# Altium PCB STM32.PcbDoc (part 1 of 2)
Units mil, origin at the board's own origin, x right, y up, seen from the top; angles counter-clockwise.
Board outline 5198.85 x 3910.46 mil, 2 copper layers (Top Layer, Bottom Layer); 118 components, 169 nets, 618 pads, 156 vias.
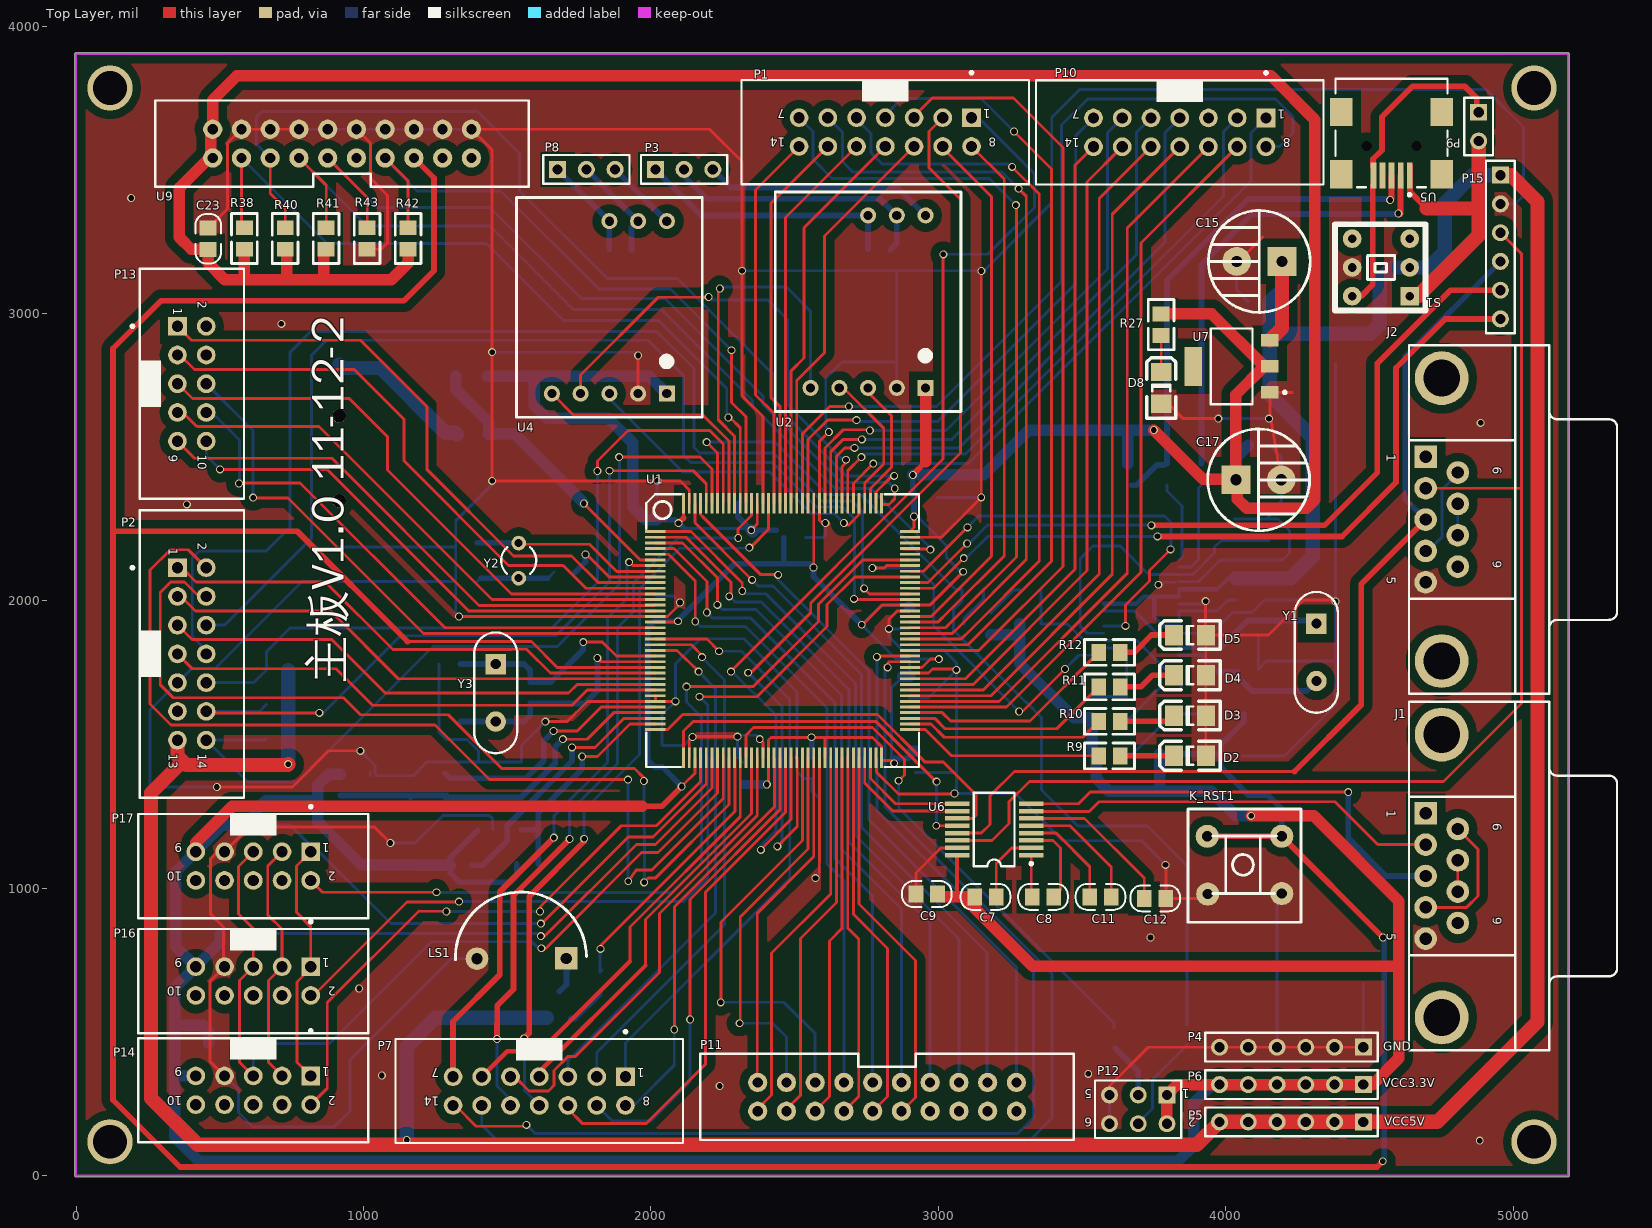
[diagram p0: Top Layer view]
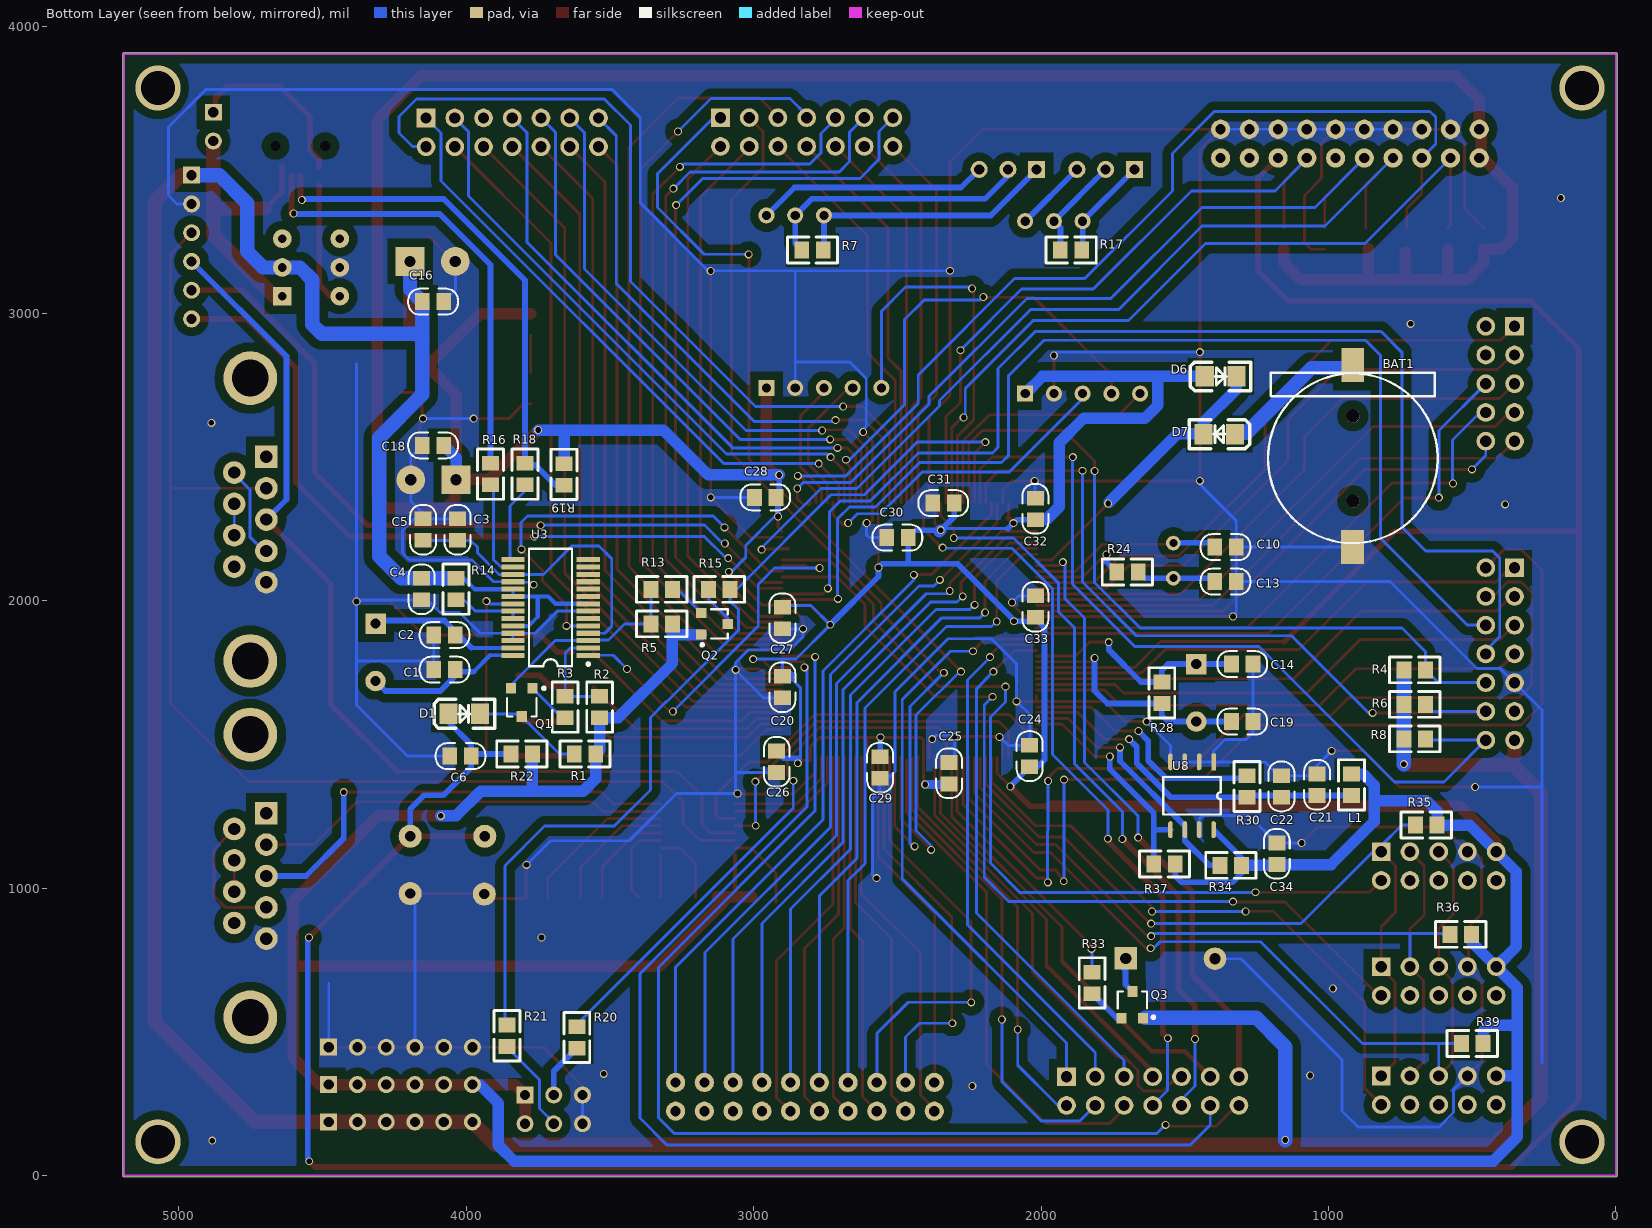
[diagram p1: Bottom Layer view, seen from below]

## Layer stack, top to bottom
Top Layer: signal copper 1.4
Dielectric: dielectric 12.6, FR-4, Dk 4.8
Bottom Layer: signal copper 1.4

## Board outline
-3.95,0 ccw(c0,0) 0,-3.95 5189.96,-3.95 ccw(c5189.96,0) 5192.76,-2.79 5193.74,-1.81 ccw(c5190.94,0.98) 5194.9,0.98 5194.9,3902.56 ccw(c5190.94,3902.56) 5190.94,3906.51 0,3906.51 ccw(c0,3902.56) -3.95,3902.56

## Design rules (kind name [scope] priority, off if disabled: settings)
Clearance [All] p1: gap=5
ComponentClearance [All] p1: gap=10 collisioncheckmode=3 verticalgap=10
HoleSize [All] p1: absolutevalues=TRUE maxlimit=200 minlimit=1 maxpercent=80.000 minpercent=20.000
PolygonConnect [IsVia + IsPad] p1: connectstyle=Direct reliefconductorwidth=10 reliefentries=4 polygonreliefangle="90 Angle"
RoutingVias [All] p1: holewidth=28 width=50 viastyle="Through Hole" minholewidth=19.68 minwidth=27.56 maxholewidth=28 maxwidth=50
SolderMaskExpansion [All] p1: expansion=4
TestPointUsage [All] p1: valid=0 allowmultiple=FALSE
Testpoint [All] p1: side=15 testpointundercomponent=TRUE minsize=40 maxsize=100 preferedsize=60 minholesize=0 maxholesize=40 preferedholesize=32 testpointgrid=1 style=1023 order=0123456789
Width [All] p1: maxlimit=50 minlimit=10 preferedwidth=10
17 further rules are at their usual default settings.

## Components (designator, comment, footprint, x,y, rotation, side; value= is the part's Value field where it differs from the comment)
BAT1 "Battery" 电池槽 915.58,2820.93 r270 bottom
C1 "Cap" 普通贴片电容 4075.58,1760.93 r180 bottom
C2 "Cap" 普通贴片电容 4075.58,1880.93 r180 bottom
C3 "Cap" 普通贴片电容 4030.38,2247.9 r270 bottom
C4 "Cap" 普通贴片电容 4155.58,2040.93 r90 bottom
C5 "Cap" 普通贴片电容 4150.38,2247.9 r90 bottom
C6 "Cap" 普通贴片电容 4020,1460 r0 bottom
C7 "" 普通贴片电容 3164.4,970.3 r180 top
C8 "" 普通贴片电容 3364.4,970.3 r180 top
C9 "" 普通贴片电容 2960,980 r180 top
C10 "Cap" 普通贴片电容 1358.62,2187.17 r180 bottom
C11 "" 普通贴片电容 3564.4,970.3 r180 top
C12 "" 普通贴片电容 3754.32,964.75 r180 top
C13 "Cap" 普通贴片电容 1358.62,2067.17 r180 bottom
C14 "22" 普通贴片电容 1300,1780 r0 bottom
C15 "Cap2" 电容100uf 4195.58,3180.93 r180 top
C16 "Cap" 普通贴片电容 4115.58,3040.93 r0 bottom
C17 "Cap2" 电容100uf 4035.58,2420.93 r0 top
C18 "Cap" 普通贴片电容 4115.58,2540.93 r180 bottom
C19 "22" 普通贴片电容 1300,1580 r0 bottom
C20 "Cap" 普通贴片电容 2900,1700 r90 bottom
C21 "Cap" 普通贴片电容 1040,1360 r270 bottom
C22 "Cap2" 普通贴片电容 1163.86,1354.33 r90 bottom
C23 "Cap" 普通贴片电容 460,3260 r270 top
C24 "Cap" 普通贴片电容 2040,1460 r270 bottom
C25 "Cap" 普通贴片电容 2320,1400 r270 bottom
C26 "Cap" 普通贴片电容 2920,1440 r90 bottom
C27 "Cap" 普通贴片电容 2900,1940 r90 bottom
C28 "Cap" 普通贴片电容 2960,2360 r180 bottom
C29 "Cap" 普通贴片电容 2560,1420 r90 bottom
C30 "Cap" 普通贴片电容 2500,2220 r180 bottom
C31 "Cap" 普通贴片电容 2340,2340 r180 bottom
C32 "Cap" 普通贴片电容 2020,2320 r270 bottom
C33 "Cap" 普通贴片电容 2020,1980 r270 bottom
C34 "Cap" 普通贴片电容 1180,1120 r270 bottom
D1 "Diode" 贴片二极管 4006.76,1606.92 r180 bottom
D2 "LED0" 贴片LED灯 3875.58,1460.93 r0 top
D3 "LED0" 贴片LED灯 3875.58,1600.93 r0 top
D4 "LED0" 贴片LED灯 3875.58,1740.93 r0 top
D5 "LED0" 贴片LED灯 3875.58,1880.93 r0 top
D6 "Diode 1N4148" 贴片二极管 1375.58,2780.93 r180 bottom
D7 "Diode 1N4148" 贴片二极管 1380,2580 r0 bottom
D8 "LED0" 贴片LED灯 3775.58,2740.93 r270 top
J1 "D9" 串口 4695.58,1260.93 r270 top
J2 "D9" 串口 4695.58,2500.93 r270 top
K_RST1 "SW-PB" 按键 3935.58,1180.93 r0 top
L1 "Inductor" 贴片电阻 920,1360 r90 bottom
LS1 "Bell" BELL 860,580 r90 top
P1 "Header 7X2A" CON14a 3115.58,3680.93 r180 top
P2 "Header 7X2" CON14 352.94,2115.42 r270 top
P3 "Header 3" HDR1X3 2015.58,3500.93 r0 top
P4 "Header 6" HDR1X6 4478.62,447.17 r180 top
P5 "Header 6" HDR1X6 4478.62,187.17 r180 top
P6 "Header 6" HDR1X6 4478.62,317.17 r180 top
P7 "Header 7X2A" CON14a 1911.64,344.52 r180 top
P8 "Header 3" HDR1X3 1675.58,3500.93 r0 top
P9 "Header 2" HDR1X2 4880,3700 r270 top
P10 "Header 7X2A" CON14a 4140,3680 r180 top
P11 "Header 10X2" CON20 3271.64,324.52 r180 top
P12 "Header 3X2" HDR2X3 3795.58,280.93 r180 top
P13 "Header 5X2" CON10 352.94,2955.42 r270 top
P14 "Header 5X2" CON10 816.68,347.15 r180 top
P15 "Header 6" HDR1X6 4955.58,3480.93 r270 top
P16 "Header 5X2" CON10 816.68,727.15 r180 top
P17 "Header 5X2" CON10 816.68,1127.15 r180 top
Q1 "NPN" "三极管 NPN" 3806.76,1646.92 r0 bottom
Q2 "PNP" "三极管 PNP" 3140,1920 r270 bottom
Q3 "PNP" "三极管 PNP" 1682.47,590.74 r180 bottom
R1 "Res1" 贴片电阻 3586.76,1466.92 r180 bottom
R2 "Res1" 贴片电阻 3535.82,1630.42 r270 bottom
R3 "Res1" 贴片电阻 3655.82,1630.42 r270 bottom
R4 "Res1" 贴片电阻 700,1760 r0 bottom
R5 "Res1" 贴片电阻 3320,1920 r0 bottom
R6 "Res1" 贴片电阻 700,1640 r0 bottom
R7 "Res1" 贴片电阻 2795.58,3220.93 r180 bottom
R8 "Res1" 贴片电阻 700,1520 r0 bottom
R9 "Res1" 贴片电阻 3595.58,1460.93 r180 top
R10 "Res1" 贴片电阻 3595.58,1580.93 r180 top
R11 "Res1" 贴片电阻 3595.58,1700.93 r180 top
R12 "Res1" 贴片电阻 3595.58,1820.93 r180 top
R13 "Res1" 贴片电阻 3320,2040 r0 bottom
R14 "Res1" 贴片电阻 4035.58,2040.93 r90 bottom
R15 "Res1" 贴片电阻 3120,2040 r0 bottom
R16 "Res1" 贴片电阻 3915.58,2440.93 r90 bottom
R17 "Res1" 贴片电阻 1895.58,3220.93 r180 bottom
R18 "Res1" 贴片电阻 3795.58,2440.93 r90 bottom
R19 "Res1" 贴片电阻 3660,2440 r270 bottom
R20 "Res1" 贴片电阻 3615.58,480.93 r270 bottom
R21 "Res1" 贴片电阻 3858.62,487.17 r90 bottom
R22 "Res1" 贴片电阻 3806.76,1466.92 r180 bottom
R24 "Res1" 贴片电阻 1700,2100 r0 bottom
R27 "Res1" 贴片电阻 3775.58,2960.93 r270 top
R28 "Res1" 贴片电阻 1580,1680 r270 bottom
R30 "Res1" 贴片电阻 1283.86,1354.33 r270 bottom
R33 "Res1" 贴片电阻 1822.47,670.74 r270 bottom
R34 "Res1" 贴片电阻 1570.82,1084.6 r180 bottom
R35 "Res1" 贴片电阻 660,1220 r180 bottom
R36 "Res1" 贴片电阻 540,840 r180 bottom
R37 "Res1" 贴片电阻 1340,1080 r0 bottom
R38 "Res1" 贴片电阻 585.38,3260.93 r90 top
R39 "Res1" 贴片电阻 500,460 r180 bottom
R40 "Res1" 贴片电阻 727.93,3260.93 r90 top
R41 "Res1" 贴片电阻 870.48,3260.93 r90 top
R42 "Res1" 贴片电阻 1155.58,3260.93 r90 top
R43 "Res1" 贴片电阻 1013.03,3260.93 r90 top
S1 "SW DIP-3" 开关 4640,3060 r180 top
U1 "STM32F103ZET6" LQFP144 2015.58,2240.93 r0 top
U2 "RSM485S_CTM8251T" RS485 2955.58,2740.93 r180 top
U3 "PL2303" SSOP28 3706.76,1986.92 r90 bottom
U4 "RSM485S_CTM8251T" RS485 2055.58,2720.93 r180 top
U5 "USB" miniUSB 4640,3480 r90 top
U6 "SP3232" SSOP16 3194.32,1204.75 r90 top
U7 "AMS1117" AMS1117 4015.58,2820.93 r90 top
U8 "24C512" SOP8 1400,1440 r270 bottom
U9 "JTAG" CON20 475.58,3540.93 r0 top
Y1 "XTAL" 晶振 4315.58,1920.93 r270 top
Y2 "32.768K" R38 1540,2140 r180 top
Y3 "8M" 晶振 1460,1780 r270 top

## Footprints (in the part's own frame and the unit in brackets; to place one, negate y for a bottom-side part, rotate by r counter-clockwise, add the part's x,y. Pads: shape width x height; smd on the part's side, far side on the other; paste and mask are expansions set on the pad)
AMS1117 [mm] "AMS1117"
  rect 1.1x1.55 smd: 1(-2.427,-3.502) 2(-0.127,-3.502) 3(2.173,-3.502)
  rect 3.45x1.55 smd: 4(-0.127,3.248)
  silkscreen extent -3.48,-4.95 3.22,1.72
BELL [mm]
  rect 2x2 hole 1: 1(4.47,-21.488)
  round 2 hole 1: 2(4.445,-13.589)
  silkscreen extent 4.35,-23.27 10.34,-11.69
CON10 [mm]
  rect 1.65x1.65 hole 1: 1(0,0)
  round 1.65 hole 1: 2(0,2.54) 3(2.54,0) 4(2.54,2.54) 5(5.08,0) 6(5.08,2.54) 7(7.62,0) 8(7.62,2.54) 9(10.16,0) 10(10.16,2.54)
  silkscreen extent -5.08,-4.1 15.24,5.87, body extent -5.08,-3.33 15.24,5.87, height 9.45
CON14 [mm]
  rect 1.65x1.65 hole 1: 1(0,0)
  round 1.65 hole 1: 2(0,2.54) 3(2.54,0) 4(2.54,2.54) 5(5.08,0) 6(5.08,2.54) 7(7.62,0) 8(7.62,2.54) 9(10.16,0) 10(10.16,2.54) 11(12.7,0) 12(12.7,2.54) 13(15.24,0) 14(15.24,2.54)
  silkscreen extent -5.08,-4.1 20.32,5.87, body extent -5.08,-3.33 20.32,5.87, height 9.45
CON14a [mm]
  rect 1.65x1.65 hole 1: 1(0,0)
  round 1.65 hole 1: 2(2.54,0) 3(5.08,0) 4(7.62,0) 5(10.16,0) 6(12.7,0) 7(15.24,0) 8(0,2.54) 9(2.54,2.54) 10(5.08,2.54) 11(7.62,2.54) 12(10.16,2.54) 13(12.7,2.54) 14(15.24,2.54)
  silkscreen extent -5.08,-4.1 20.32,5.87, body extent -5.08,-3.33 20.32,5.87, height 9.45
CON20 [mm]
  round 1.7 hole 0.9: 1(0,0) 2(0,2.54) 3(2.54,0) 4(2.54,2.54) 5(5.08,0) 6(5.08,2.54) 7(7.62,0) 8(7.62,2.54) 9(10.16,0) 10(10.16,2.54) 11(12.7,0) 12(12.7,2.54) 13(15.24,0) 14(15.24,2.54) 15(17.78,0) 16(17.78,2.54) 17(20.32,0) 18(20.32,2.54) 19(22.86,0) 20(22.86,2.54)
  silkscreen extent -5.08,-2.54 27.94,5.08
HDR1X2 [mm] "Connector; Header; 2 Position"
  rect 1.5x1.5 hole 0.9: 1(0,0)
  round 1.5 hole 0.9: 2(2.54,0)
  silkscreen extent -1.27,-1.27 3.81,1.27
HDR1X3 [mm] "Connector; Header; 3 Position"
  rect 1.5x1.5 hole 0.9: 1(0,0)
  round 1.5 hole 0.9: 2(2.54,0) 3(5.08,0)
  silkscreen extent -1.27,-1.27 6.35,1.27
HDR1X6 [mm] "Connector; Header; 6 Position"
  rect 1.5x1.5 hole 0.9: 1(0,0)
  round 1.5 hole 0.9: 2(2.54,0) 3(5.08,0) 4(7.62,0) 5(10.16,0) 6(12.7,0)
  silkscreen extent -1.27,-1.27 13.97,1.27
HDR2X3 [mm] "Connector; Header; 3x2 Position"
  rect 1.5x1.5 hole 0.9: 1(0,0)
  round 1.5 hole 0.9: 2(0,2.54) 3(2.54,0) 4(2.54,2.54) 5(5.08,0) 6(5.08,2.54)
  silkscreen extent -1.27,-1.27 6.35,3.81
LQFP144 [mm]
  rect 1.8x0.254 smd: 1(0,0) 2(0,-0.5) 3(0,-1) 4(0,-1.5) 5(0,-2) 6(0,-2.5) 7(0,-3) 8(0,-3.5) 9(0,-4) 10(0,-4.5) 11(0,-5) 12(0,-5.5) 13(0,-6) 14(0,-6.5) 15(0,-7) 16(0,-7.5) 17(0,-8) 18(0,-8.5) 19(0,-9) 20(0,-9.5) 21(0,-10) 22(0,-10.5) 23(0,-11) 24(0,-11.5) 25(0,-12) 26(0,-12.5) 27(0,-13) 28(0,-13.5) 29(0,-14) 30(0,-14.5) 31(0,-15) 32(0,-15.5) 33(0,-16) 34(0,-16.5) 35(0,-17) 36(0,-17.5) 73(22.5,-17.5) 74(22.5,-17) 75(22.5,-16.5) 76(22.5,-16) 77(22.5,-15.5) 78(22.5,-15) 79(22.5,-14.5) 80(22.5,-14) 81(22.5,-13.5) 82(22.5,-13) 83(22.5,-12.5) 84(22.5,-12) 85(22.5,-11.5) 86(22.5,-11) 87(22.5,-10.5) 88(22.5,-10) 89(22.5,-9.5) 90(22.5,-9) 91(22.5,-8.5) 92(22.5,-8) 93(22.5,-7.5) 94(22.5,-7) 95(22.5,-6.5) 96(22.5,-6) 97(22.5,-5.5) 98(22.5,-5) 99(22.5,-4.5) 100(22.5,-4) 101(22.5,-3.5) 102(22.5,-3) 103(22.5,-2.5) 104(22.5,-2) 105(22.5,-1.5) 106(22.5,-1) 107(22.5,-0.5) 108(22.5,0)
  rect 0.254x1.8 smd: 37(2.5,-20) 38(3,-20) 39(3.5,-20) 40(4,-20) 41(4.5,-20) 42(5,-20) 43(5.5,-20) 44(6,-20) 45(6.5,-20) 46(7,-20) 47(7.5,-20) 48(8,-20) 49(8.5,-20) 50(9,-20) 51(9.5,-20) 52(10,-20) 53(10.5,-20) 54(11,-20) 55(11.5,-20) 56(12,-20) 57(12.5,-20) 58(13,-20) 59(13.5,-20) 60(14,-20) 61(14.5,-20) 62(15,-20) 63(15.5,-20) 64(16,-20) 65(16.5,-20) 66(17,-20) 67(17.5,-20) 68(18,-20) 69(18.5,-20) 70(19,-20) 71(19.5,-20) 72(20,-20) 109(20,2.5) 110(19.5,2.5) 111(19,2.5) 112(18.5,2.5) 113(18,2.5) 114(17.5,2.5) 115(17,2.5) 116(16.5,2.5) 117(16,2.5) 118(15.5,2.5) 119(15,2.5) 120(14.5,2.5) 121(14,2.5) 122(13.5,2.5) 123(13,2.5) 124(12.5,2.5) 125(12,2.5) 126(11.5,2.5) 127(11,2.5) 128(10.5,2.5) 129(10,2.5) 130(9.5,2.5) 131(9,2.5) 132(8.5,2.5) 133(8,2.5) 134(7.5,2.5) 135(7,2.5) 136(6.5,2.5) 137(6,2.5) 138(5.5,2.5) 139(5,2.5) 140(4.5,2.5) 141(4,2.5) 142(3.5,2.5) 143(3,2.5) 144(2.5,2.5)
  silkscreen extent -0.8,-20.8 23.3,3.3
miniUSB [mm]
  rect 2.3x0.5 smd: 1(0,0) 2(0,0.8) 3(0,1.6) 4(0,2.4) 5(0,3.2)
  rect 2.5x2 smd: 6(0.1,6.05) 7(5.6,6.05) 8(0.1,-2.85) 9(5.6,-2.85)
  round 0.6 hole 0.9 unplated: MH1(2.6,3.8) MH2(2.6,-0.6)
  silkscreen extent -1.82,-3.35 8.55,6.55, body extent -1.05,-3.35 8.55,6.55, height 3.9
R38 [mm] "Crystal, Thru-Hole; 2 Leads; Body 3.1 x 8.2 mm (Dia.xH)"
  round 1.3 hole 0.7: 1(0,1.55) 2(0,-1.55)
  silkscreen extent -1.55,-1.19 1.55,1.17
RS485 [mil]
  rect 56x56 hole 32: 1(0,0)
  round 56 hole 32: 2(100,0) 3(200,0) 4(300,0) 5(400,0) 8(200,-600) 9(100,-600) 10(0,-600)
  silkscreen extent -123,-682 523,82
SOP8 [mm]
  rect 1.5x0.4 smd: 1(0,0)
  oval 1.5x0.4 smd: 2(0,-1.27) 3(0,-2.54) 4(0,-3.81) 5(6,-3.81) 6(6,-2.54) 7(6,-1.27) 8(6,0)
  silkscreen extent 1.33,-4.45 4.67,0.63
SSOP16 [mm] "SSOP; 16 Leads; Body Width 5.3 mm; Pitch 0.65 mm"
  rect 0.4x2.15 smd: 1(-2.275,-3.275) 2(-1.625,-3.275) 3(-0.975,-3.275) 4(-0.325,-3.275) 5(0.325,-3.275) 6(0.975,-3.275) 7(1.625,-3.275) 8(2.275,-3.275) 9(2.275,3.275) 10(1.625,3.275) 11(0.975,3.275) 12(0.325,3.275) 13(-0.325,3.275) 14(-0.975,3.275) 15(-1.625,3.275) 16(-2.275,3.275)
  silkscreen extent -3.25,-3.4 3.25,1.8
SSOP28 [mm] "SP3238"
  rect 0.45x2.05 smd: 1(-4.479,-3.325) 2(-3.829,-3.325) 3(-3.179,-3.325) 4(-2.529,-3.325) 5(-1.879,-3.325) 6(-1.229,-3.325) 7(-0.579,-3.325) 8(0.071,-3.325) 9(0.721,-3.325) 10(1.371,-3.325) 11(2.021,-3.325) 12(2.671,-3.325) 13(3.321,-3.325) 14(3.971,-3.325) 15(3.971,3.325) 16(3.321,3.325) 17(2.671,3.325) 18(2.021,3.325) 19(1.371,3.325) 20(0.721,3.325) 21(0.071,3.325) 22(-0.579,3.325) 23(-1.229,3.325) 24(-1.879,3.325) 25(-2.529,3.325) 26(-3.179,3.325) 27(-3.829,3.325) 28(-4.479,3.325)
  silkscreen extent -5.45,-3.45 4.95,1.9
"三极管 NPN" [mm]
  rect 0.9x0.95 smd: 1(0,1.25) 2(-0.95,-1.25) 3(0.95,-1.25)
  silkscreen extent -2.07,-1.37 1.3,1.25
"三极管 PNP" [mm]
  rect 0.9x0.95 smd: 1(0,1.27) 2(-0.95,-1.08) 3(0.95,-1.08)
  silkscreen extent -1.3,-1.13 1.98,1.27
串口 [mm]
  rect 2x2 hole 1.09: 1(0,0)
  round 2 hole 1.09: 2(2.77,0) 3(5.54,0) 4(8.31,0) 5(11.08,0) 6(1.385,2.84) 7(4.155,2.84) 8(6.925,2.84) 9(9.695,2.84)
  round 4.76 hole 3.26: 10(-6.955,1.42) 11(18.035,1.42)
  silkscreen extent -9.86,-1.48 20.94,16.92
开关 [mil]
  rect 65x65 hole 30: 1(0,0)
  round 65 hole 30: 2(0,-100) 3(0,-200) 4(200,-200) 5(200,-100) 6(200,0)
  silkscreen extent -55,-250 260,50
按键 [mil]
  round 80 hole 35.43: 1(0,0) 1(259.47,0) 2(1.76,-201.22) 2(259.47,-199.45)
  silkscreen extent -67,-299 327,95
普通贴片电容 [mm]
  rect 1.3x1.5 smd: 1(-0.95,0) 2(0.95,0)
  silkscreen extent -2.19,-1.14 2.19,1.14
晶振 [mm]
  rect 1.8x1.8 hole 0.9: 1(0,0)
  round 1.8 hole 0.9: 2(5.08,0)
  silkscreen extent -2.79,-1.91 7.87,1.91
电容100uf [mm]
  rect 2.54x2.54 hole 1: 1(0,0)
  round 2.54 hole 1: 2(4,0)
  silkscreen extent -2.5,-4.5 6.5,4.5
电池槽 [mm]
  round 1.2 hole 1.2: 0(4.505,0) 0(12.005,0)
  rect 3x2 smd: 1(0,0) 2(16.104,-0.025)
  silkscreen extent 0.7,-7.5 15.75,7.5
贴片LED灯 [mm]
  rect 1.6x1.8 smd: 1(-1.4,0) 2(1.4,0)
  silkscreen extent -2.67,-1.27 2.67,1.27
贴片二极管 [mm]
  rect 1.6x1.8 smd: 1(-1.4,0) 2(1.4,0)
  silkscreen extent -2.67,-1.27 2.67,1.27
贴片电阻 [mm]
  rect 1.3x1.5 smd: 1(-0.95,0) 2(0.95,0)
  silkscreen extent -2.22,-1.14 2.22,1.14

## Part data
BAT1: "Multicell Battery"
C1 C2 C3 C4 C5 C6 C10 C13 C15 C16 C17 C18 C20 C21 C22 C23 C24 C25 C26 C27 C28 C29 C30 C31 C32 C33 C34: "Capacitor"
C7 C8 C9 C11 C12: library part "Cap Semi", "Capacitor (Semiconductor SIM Model)"
C14 C19: library part Cap, "Capacitor"
D1: "Default Diode"
D2 D3 D4 D5 D8: "Typical INFRARED GaAs LED"
D6 D7: "High Conductance Fast Diode"
J1 J2: library part "D Connector 9", "Receptacle Assembly, 9 Position, Right Angle"
K_RST1: "Switch"
LS1: "Electrical Bell"
P1 P2 P7 P10: "Header, 7-Pin, Dual row"
P3 P8: "Header, 3-Pin"
P4 P5 P6 P15: "Header, 6-Pin"
P9: "Header, 2-Pin"
P11: "Header, 10-Pin, Dual row"
P12: "Header, 3-Pin, Dual row"
P13 P14 P16 P17: "Header, 5-Pin, Dual row"
Q1: "NPN Bipolar Transistor"
Q2 Q3: "PNP Bipolar Transistor"
R1 R2 R3 R4 R5 R6 R7 R8 R9 R10 R11 R12 R13 R14 R15 R16 R17 R18 R19 R20 R21 R22 R24 R27 R28 R30 R33 R34 R35 R36 R37 R38 R39 R40 R41 R42 R43: "Resistor"
S1: "DIP Switch, 3 Position, SPST"
U6: library part MAX232
U8: library part ST24C02M1, "Serial 2K (256 x 8) EEPROM"
Y1: "Crystal Oscillator"
Y2 Y3: library part XTAL, "Crystal Oscillator"

## Free pads (board coordinates)
  round 157.48 hole 118.11: 0(5072.83,3784.45) 1(5072.83,118.11) 2(118.11,118.11) 3(118.11,3784.45)

## Via types
v1: diameter 27.56, hole 19.68, Top Layer to Bottom Layer, 156 vias

## Nets (pads, with @x,y where several pads share a name; then routed paths per layer and width w, separated by ;. In a path a pad name is that pad's centre, name@x,y a point inside that pad or via, vN(x,y) a via of type N, cw(c..) or ccw(c..) an arc to the next point about the centre after c; other vN are vias at no path point)
3V3: C3.2 C5.1 U3.4 U3.17 | length 1103.1
  Bottom Layer w10: U3.4@3575.86,1887.35 3518.16,1887.35 3493.97,1911.55 3493.97,2146.52 3538.26,2190.82 3633.1,2190.82 3731.84,2092.08 U3.17@3837.67,2092.08 3886.37,2092.08 3961.49,2167.19 3961.49,2186.88 3985.11,2210.5 C3.2@4030.38,2210.5 C5.1@4150.38,2210.5
4851A: P3.2 R7.1 U2.9 | length 948.7
  Bottom Layer w20: P3.2@2115.58,3500.93 2115.58,3478.65 2195.61,3398.62 2797.89,3398.62 U2.9@2855.58,3340.93 2855.58,3243.53 R7.1@2832.98,3220.94
4851B: P3.1 R7.2 U2.8 | length 923.7
  Bottom Layer w20: P3.1@2015.58,3500.93 2175.58,3340.93 U2.8@2755.58,3340.93 R7.2@2755.58,3223.53
4851G: P3.3 U2.10 | length 806.3
  Bottom Layer w20: P3.3@2215.58,3500.93 2278.52,3437.99 2858.52,3437.99 U2.10@2955.58,3340.93
4852A: P8.2 R17.1 U4.9 | length 363.9
  Bottom Layer w20: P8.2@1775.58,3500.93 U4.9@1955.58,3320.93 1932.98,3298.34 R17.1@1932.98,3220.94
4852B: P8.1 R17.2 U4.8 | length 352
  Bottom Layer w20: P8.1@1675.58,3500.93 U4.8@1855.58,3320.93 R17.2@1855.58,3223.53
4852G: P8.3 U4.10 | length 254.6
  Bottom Layer w20: P8.3@1875.58,3500.93 U4.10@2055.58,3320.93
BEEP: R33.1 U1.46 | length 952.3
  Top Layer w10: v1(1824.8,789.37) 1824.8,800.2 2292.53,1267.92 U1.46@2292.53,1453.53 ; U1.46@2291.17,1456.37 U1.46@2292.53,1455.01
  Bottom Layer w10: v1(1824.8,789.37) 1822.47,787.04 R33.1@1822.47,708.14 R33.1@1829.75,715.42
BOOT0: R15.1 R21.2 U1.138 | length 3334.2
  Top Layer w10: v1(2193.9,2552.17) 2232.12,2513.95 U1.138@2232.12,2342.19
  Bottom Layer w10: v1(2193.9,2552.17) 2431.1,2552.17 2614.17,2369.09 2731.3,2369.09 3060.39,2040 R15.1@3082.6,2040 3082.6,1998.94 3053.36,1969.7 3053.36,1897.64 3303.38,1647.62 3306.21,1647.62 3359.25,1594.58 3359.25,1342.52 3485.24,1216.54 3727.36,1216.54 3865.78,1078.12 R21.2@3865.78,524.57
BOOT1: R20.1 U1.48 | length 1936.3
  Top Layer w10: U1.48@2330.54,1456.37 2330.54,1532.31 2357.28,1559.06 2770.67,1559.06 2881.89,1447.83 2881.89,1393.7 v1(2862.2,1374.02)
  Bottom Layer w10: v1(2862.2,1374.02) 2862.2,1279.53 3611.88,529.85 R20.1@3611.88,514.64
GND: BAT1.2 C1.1 C2.1 C3.1 C4.1 C5.2 C6.2 C9.2 C10.2 C12.1 C13.2 C14.1 C15.2 C16.1 C17.2 C18.1 C19.1 C20.1 C21.1 C22.2 C23.1 C24.1 C25.1 C26.1 C27.1 C28.1 C29.1 C30.1 C31.1 C32.1 C33.1 C34.1 D2.2 D3.2 D4.2 D5.2 D8.2 J1.5 J2.5 K_RST1.2 LS1.2 P2.9 P4.1 P4.2 P4.3 P4.4 P4.5 P4.6 P12.5 P12.6 P14.7 P15.2 P16.7 P17.7 R43.1 S1.5 U1.16 U1.30 U1.31 U1.38 U1.51 U1.61 U1.71 U1.83 U1.94 U1.107 U1.120 U1.130 U1.143 U2.2 U3.7 U3.18 U3.21 U3.25 U3.26 U4.2 U6.15 U7.1 U8.1 U8.2 U8.3 U8.4 U8.7 U9.4 U9.6 U9.8 U9.10 U9.12 U9.14 U9.16 U9.18 U9.20 | length 36852.9
  Top Layer w10: C23.1@460,3297.4 527.12,3364.52 527.12,3592.47 U9.4@575.58,3640.93 U9.8@775.58,3640.93 ; v1(490.16,1352.36) 752.95,1352.36 878.94,1478.35 v1(989.17,1478.35) ; P14.7@516.68,347.15 465.55,398.29 465.55,676.02 512.8,723.27 512.8,865.16 468.5,909.45 468.5,1103.35 492.31,1127.15 P17.7@516.68,1127.15 602.13,1212.6 1038.39,1212.6 v1(1093.58,1157.4) ; U9.12@975.58,3640.93 1024.04,3592.47 1024.04,3470.05 1083.66,3410.43 1083.66,3246.06 1061.13,3223.53 R43.1@1013.03,3223.53 ; v1(1332.47,1945.66) 2057.86,1945.66 2104.33,1992.13 2102.26,1994.19 v1(2101.48,1994.19) ; v1(1632.87,1579.72) 1708.66,1579.72 1779.32,1650.38 v1(2085.42,1650.38) ; U4.2@1955.58,2720.93 v1(1955.58,2853.48) ; U1.31@2015.58,1650.38 U1.30@2015.58,1670.07 ; U1.38@2133.69,1453.53 2133.69,1515.58 2146.65,1528.54 2300.2,1528.54 v1(2301.18,1527.56) ; U1.143@2133.69,2339.36 2133.69,2386.16 2102.53,2417.32 v1(1447.83,2417.32) 1447.83,3568.68 U9.20@1375.58,3640.93 2204.54,3640.93 2316.93,3528.54 2316.93,2713.71 2389.6,2641.05 U1.130@2389.6,2339.36 ; v1(2378.94,1518.7) 2389.6,1508.04 U1.51@2389.6,1453.53 ; 2585.63,1057.09 2586.45,1118.28 U1.61@2586.45,1453.53 ; U1.120@2586.45,2339.36 2586.45,2280.54 2596.32,2270.67 v1(2607.28,2270.67) ; U1.120@2586.61,2363.19 2586.61,2555.12 v1(2619.09,2587.6) ; U1.71@2783.3,1453.53 2784.98,1451.85 2784.98,1404 2861.22,1327.76 v1@3056.1,1327.76 ; v1(2828.74,1902.56) 2828.1,1902.56 2827.76,1902.91 2827.76,1935.04 2858.06,1965.34 U1.94@2901.41,1965.34 ; U1.83@2901.41,1748.81 2966.33,1748.81 2980.32,1762.8 v1@3060.04,1762.8 ; U1.107@2901.41,2221.25 2901.61,2221.46 3010.83,2221.46 v1(3149.37,2360) ; C9.2@2922.6,952.4 2922.6,1053.5 3009.87,1140.78 U6.15@3065.38,1140.78 ; v1@3149.61,2360.24 v1(3149.61,3147.64) ; P12.5@3595.58,280.93 3595.58,312.12 3730.63,447.17 P4.1@4478.62,447.17 ; D8.2@3775.58,2685.82 3800.4,2685.82 3852.36,2633.86 v1(3974.41,2633.86) ; v1@3791.72,1081.31 C12.1@3791.72,964.75 3922.38,964.75 3939.11,981.48 K_RST1.2@4195.05,981.48 ; v1(3930.12,1999.02) 3930.12,1881.51 D5.2@3930.7,1880.93 ; D2.2@3930.7,1460.93 D5.2@3930.7,1880.93 ; C15.2@4038.1,3180.93 4044.12,3180.93 4128.94,3265.75 ; v1(4150.59,2633.86) 4156.03,2641.49 C17.2@4193.06,2420.93 ; v1@4153.45,2638.69 U7.1@4153.45,2725.38 4231.29,2725.38 ; v1@4376.97,2002.95 4270.67,2002.95 4148.65,1880.93 D5.2@3930.7,1880.93
  Bottom Layer w10: 257.87,391.73 257.87,1620.35 402.56,1765.04 483.54,1765.04 785.67,2067.16 C13.2@1321.22,2067.16 ; 257.87,1353.35 258.86,1352.36 v1(490.16,1352.36) ; 257.87,1362.2 258.86,1363.19 ; P14.7@516.68,347.15 564.96,298.88 564.96,219.49 615.16,169.29 896.65,169.29 952.76,225.39 952.76,403.54 1304.21,755 LS1.2@1395,755 ; U9.8@775.58,3640.93 U9.20@1375.58,3640.93 ; BAT1.2@916.58,2186.93 1320.99,2186.93 1320.99,2278.83 1447.83,2405.68 v1(1447.83,2417.32) ; v1(989.17,1478.35) 1040,1427.52 C21.1@1040,1397.4 1045.67,1391.73 1173.19,1391.73 1221.46,1440 U8.4@1550,1440 1550,1496.85 v1(1632.87,1579.72) ; C21.1@1023.86,1391.73 C21.1@1023.86,1406.91 ; v1(1093.58,1157.4) C34.1@1180,1157.4 1276.34,1253.74 1437.99,1253.74 1450,1241.73 U8.7@1450,1203.78 ; C14.1@1262.6,1780 1262.6,1542.52 1287.4,1517.72 1360.24,1517.72 1400,1477.95 U8.1@1400,1440 ; C10.2@1321.22,2187.16 1321.22,1956.91 v1(1332.47,1945.66) ; v1(1447.83,2865.16) 1943.9,2865.16 v1(1955.58,2853.48) ; C33.1@2020,2017.4 2079.06,2017.4 2102.26,1994.19 v1(2101.48,1994.19) ; C32.1@2020,2357.4 2021.65,2359.05 v1@2021.65,2417.32 ; v1(2144.68,1526.57) 2143.7,1526.57 2114.53,1497.4 C24.1@2040,1497.4 2039.16,1498.24 2039.16,1604.12 v1(2085.42,1650.38) 2085.42,1781.29 2172.24,1868.11 2323.82,1868.11 2507.87,1684.06 2507.87,1406.5 2531.77,1382.6 C29.1@2560,1382.6 2560,1338.62 2586.45,1312.18 2586.45,1047.08 ; v1(2316.93,3148.62) 2855.58,3148.62 U2.2@2855.58,2740.93 ; C25.1@2320,1437.4 2301.18,1456.22 v1(2301.18,1527.56) 2305.93,1532.31 2365.33,1532.31 v1(2378.94,1518.7) ; C30.1@2537.4,2220 2598.94,2220 2607.28,2228.35 v1(2607.28,2270.67) ; v1(2619.09,2587.6) 2619.09,2595.47 2608.27,2606.3 2608.27,2773.62 2666.34,2831.69 2855.58,2831.69 ; 2855.58,3145.93 2858.27,3148.62 3158.46,3148.62 3394.68,3384.84 3394.68,3682.09 3491.14,3778.54 4906.5,3778.54 5036.42,3648.62 5036.42,3410.43 5006.92,3380.93 P15.2@4955.58,3380.93 ; C20.1@2900,1662.6 2965.75,1662.6 v1(3062.99,1759.84) ; C27.1@2900,1902.6 2899.96,1902.56 v1(2828.74,1902.56) 2828.74,1875 2874.02,1829.72 3017.72,1829.72 3062.99,1784.45 3062.99,1336.61 v1(3056.1,1329.72) 3268.7,1329.72 3433.07,1165.35 3706.69,1165.35 v1(3790.35,1081.69) ; C26.1@2920,1402.6 3062.95,1402.6 3062.99,1402.56 ; C28.1@2997.4,2360 v1(3149.37,2360) ; U3.7@3575.86,1964.12 3683.51,1964.12 3760.29,1887.35 3951.33,1887.35 4023.62,1959.65 4091.54,1959.65 4135.42,2003.53 v1@4376.39,2003.53 ; P12.6@3595.58,180.93 P12.5@3595.58,280.93 ; v1(3765.75,2056.1) 3774.61,2064.96 U3.18@3823.82,2064.96 ; U3.26@3837.67,1861.76 U3.25@3837.67,1887.35 ; U3.21@3837.67,1989.71 3920.82,1989.71 v1(3930.12,1999.02) ; U3.18@3837.67,2066.48 3905.07,2066.48 3980.32,2141.73 4197.83,2141.73 4222.44,2166.34 4222.44,2245.08 4182.21,2285.31 C5.2@4150.38,2285.31 ; K_RST1.2@3921.16,963.53 K_RST1.2@3937.34,979.72 ; v1(3974.41,2633.86) v1(4150.59,2633.86) ; C3.1@4030.38,2285.31 C5.2@4150.38,2285.31 ; C15.2@4038.1,3180.93 4038.1,3081.01 C16.1@4078.18,3040.93 ; C6.2@4057.4,1460 4204.09,1460 4381.89,1637.8 v1(4381.89,1998.03) ; C2.1@4112.98,1880.93 C1.1@4112.98,1760.93 4142.4,1790.35 4381.89,1790.35 ; C18.1@4152.98,2540.93 4193.06,2500.86 4193.06,2347.59 4150.38,2304.91 C5.2@4150.38,2285.31 ; P4.4@4178.62,447.17 4178.62,965.06 K_RST1.2@4195.05,981.48 ; v1@4381.89,2003.53 4381.89,2824.8 ; P4.1@4478.62,447.17 4478.62,668.58
  other v1: 4883.86,122.05 2239.43,312.27 1063.98,348.43 3521.65,354.33 985.24,651.57 3738.19,828.74 2572.83,1035.43 385.83,2335.63 2022.64,2417.32 4886.81,2619.09 714.57,2963.58 191.93,3401.57
GNDIN: P9.1 S1.6 U5.5 | length 1066.9
  Top Layer w20: S1.6@4440,3060 4471.42,3060 4511.81,3100.39 U5.5@4511.81,3445.87 ; U5.5@4512.8,3509.84 4512.8,3537.4 4543.31,3567.91 4543.31,3684.06 4649.61,3790.35 4831.69,3790.35 4873.03,3749.02 P9.1@4873.03,3693.9
GPRS_OFF: P15.5 U1.99 | length 2698.9
  Top Layer w10: U1.99@2901.41,2063.77 2963.73,2063.77 v1@3099.76,2199.8
  Top Layer w20: v1@3099.76,2199.8 v1(3100.39,2199.8) ; v1(3741.14,2262.67) 4343.38,2262.67 4527.56,2446.85 4527.56,2826.77 4781.72,3080.93 P15.5@4955.58,3080.93
  Bottom Layer w10: v1(3100.39,2199.8) 3107.54,2199.8 3171.38,2263.65 3740.16,2263.65 v1(3741.14,2262.67)
GPRS_ON: P15.6 U1.98 | length 2660.4
  Top Layer w10: U1.98@2901.41,2044.08 2982.49,2044.08 2983.27,2043.31 v1(3088.58,2148.62)
  Top Layer w20: 3778.41,2224.08 4404.2,2224.08 4592.52,2412.4 4592.52,2810.04 4763.41,2980.93 P15.6@4955.58,2980.93
  Bottom Layer w10: v1(3088.58,2148.62) 3096.46,2148.62 3171.92,2224.08 3762.67,2224.08 3762.8,2224.21 v1(3762.8,2224.41)
I2C_SCL: R37.2 U1.34 U8.6 | length 909.2
  Top Layer w10: v1(1725.39,1490.16) 1805.12,1490.16 1906.29,1591.33 U1.34@2015.58,1591.33 ; U1.34@2014.6,1591.21 U1.34@2015.58,1591.21
  Bottom Layer w20: R37.2@1377.4,1080 1414.64,1080 1500,1165.35 U8.6@1500,1203.78 1500,1217.52 1725.39,1442.91 v1(1725.39,1490.16)
I2C_SDA: R34.1 U1.35 U8.5 | length 795.1
  Top Layer w10: v1(1760.83,1458.66) 1813.98,1458.66 1926.96,1571.64 U1.35@2015.58,1571.64
  Bottom Layer w20: U8.5@1550,1203.78 1606.29,1203.78 ; R34.1@1608.22,1084.6 1608.22,1261.77 1760.83,1414.37 v1(1760.83,1458.66)
INPUT1: P11.1 U1.141 | length 2508
  Top Layer w10: U1.141@2173.06,2342.19 U1.141@2173.06,2339.36 2173.06,2300.23 2182.36,2290.93 2182.5,2290.93 2382.33,2091.09 2442.37,2091.09 v1(2442.91,2090.55)
  Bottom Layer w10: v1(2442.91,2090.55) 2442.91,2072.32 2758.86,1756.38 2758.86,1238.19 3271.64,725.4 P11.1@3271.64,324.52
INPUT2: P11.3 U1.142 | length 2467
  Top Layer w10: U1.142@2153.38,2339.36 2153.38,2272.08 v1(2352.36,2073.09)
  Bottom Layer w10: v1(2352.36,2073.09) 2373.29,2052.17 2425.2,2052.17 2733.27,1744.09 2733.27,1212.6 3169.16,776.7 3169.16,327 P11.3@3171.64,324.52
INPUT3: P11.5 U1.1 | length 2469.8
  Top Layer w10: U1.1@2015.58,2240.93 2139.46,2240.93 2317.91,2062.48 v1(2317.91,2034.45)
  Bottom Layer w10: v1(2317.91,2034.45) 2327.76,2024.61 2399.61,2024.61 2711.61,1712.6 2711.61,1184.06 3071.64,824.03 P11.5@3071.64,324.52 ; P11.5@3070.78,323.65 P11.5@3071.72,322.71
INPUT4: P11.7 U1.2 | length 2414.3
  Top Layer w10: U1.2@2015.58,2221.25 2122,2221.25 2279.4,2063.84 2279.4,2022.51 v1(2272.64,2015.75)
  Bottom Layer w10: v1(2272.64,2015.75) 2292.32,1996.06 2383.86,1996.06 2689.96,1689.96 2689.96,1159.45 2971.64,877.77 P11.7@2971.64,324.52
INPUT5: P11.9 U1.3 | length 2356.3
  Top Layer w10: U1.3@2015.58,2201.56 2110.31,2201.56 2231.3,2080.57 v1(2231.3,1986.22)
  Bottom Layer w10: v1(2231.3,1986.22) 2248.03,1969.49 2366.14,1969.49 2663.39,1672.24 2663.39,1135.83 2871.64,927.57 P11.9@2871.64,324.52
INPUT6: P11.11 U1.4 | length 2285.9
  Top Layer w10: U1.4@2015.58,2181.88 2080.66,2181.88 2194.88,2067.66 v1(2194.88,1959.65)
  Bottom Layer w10: v1(2194.88,1959.65) 2213.58,1940.94 2345.47,1940.94 2640.75,1645.67 2640.75,1104.33 2771.64,973.44 P11.11@2771.64,324.52
INPUT7: P11.13 U1.5 | length 2239.2
  Top Layer w10: U1.5@2015.58,2162.19 2060.97,2162.19 2154.53,2068.64 v1(2154.53,1928.15)
  Bottom Layer w10: v1(2154.53,1928.15) 2172.24,1910.43 2329.72,1910.43 2613.19,1626.97 2613.19,1085.63 2671.64,1027.18 P11.13@2671.64,324.52 P11.13@2666.62,324.52 ; P11.13@2672.12,324.67 P11.13@2678.02,324.67
INPUT8: P11.15 U1.58 | length 1511.8
  Top Layer w10: v1@2243.97,603.35 2243.97,882.75 2527.76,1166.54 U1.58@2527.76,1453.53 ; U1.58@2527.39,1456.37 U1.58@2527.76,1456
  Bottom Layer w10: v1(2243.11,603.35) 2462.6,603.35 2571.64,494.3 P11.15@2571.64,324.52
INPUT9: P11.17 U1.59 | length 1363.9
  Top Layer w10: v1@2310.89,530.51 2310.89,900.46 2547.08,1136.64 U1.59@2547.08,1456.37
  Bottom Layer w10: v1(2309.06,530.51) 2423.23,530.51 2471.64,482.1 P11.17@2471.64,324.52
INPUT10: P11.19 U1.60 | length 1214.2
  Top Layer w10: P11.19@2369.95,323.69 2369.95,913.26 2566.76,1110.07 U1.60@2566.76,1456.37
INPUT11: P11.20 U1.63 | length 1338.2
  Top Layer w10: P11.20@2371.92,223.3 2371.92,233.14 2420.11,281.33 2420.11,774.44 2625.82,980.15 U1.63@2625.82,1456.37
INPUT12: P11.18 U1.64 | length 1305.8
  Top Layer w10: P11.18@2472.31,222.31 2472.31,232.15 2520.11,279.95 2520.11,825.23 2645.5,950.62 U1.64@2645.5,1456.37
INPUT13: P11.16 U1.65 | length 1271.6
  Top Layer w10: P11.16@2569.75,224.28 2620.93,275.46 2620.93,816.8 2665.19,861.05 U1.65@2665.19,1453.53 U1.65@2665.19,1456.37
INPUT14: P11.14 U1.66 | length 1269.1
  Top Layer w10: P11.14@2671.64,224.52 2723.18,276.05 2723.18,823.08 2684.87,861.39 U1.66@2684.87,1456.37
INPUT15: P11.12 U1.67 | length 1304.5
  Top Layer w10: U1.67@2704.56,1456.37 2704.56,909.62 2823.18,790.99 2823.18,276.05 P11.12@2771.64,224.52 ; P11.12@2769.56,222.31 P11.12@2769.56,224.52
INPUT16: P11.10 U1.68 | length 1335.3
  Top Layer w10: U1.68@2724.24,1456.37 2724.24,945.05 2920.28,749.02 2920.28,272.64 2871.92,224.28 P11.10@2869.95,224.28
JTCK: R43.2 U1.109 U9.9 | length 2858.4
  Top Layer w10: U9.9@875.58,3540.93 1013.03,3403.48 R43.2@1013.03,3298.34 ; U1.109@2802.98,2342.19 U1.109@2802.98,2339.36 2806.71,2335.63 2828.74,2335.63 2848.43,2355.31 v1(2848.43,2390.75)
  Bottom Layer w10: U9.9@875.58,3540.93 1047.55,3368.97 1440.82,3368.97 1757.62,3052.17 2049.21,3052.17 2389.64,2711.74 2389.64,2684.18 2662.12,2411.7 2827.47,2411.7 v1(2848.43,2390.75)
JTDI: R40.2 U1.110 U9.5 | length 3436.9
  Top Layer w10: U9.5@675.58,3540.93 675.58,3416.94 727.93,3364.59 R40.2@727.93,3298.34 ; U1.110@2783.3,2342.19 2783.3,2378.49 2839.84,2435.04 v1(2846.46,2435.04)
  Bottom Layer w10: U9.5@675.58,3540.93 627.12,3589.4 627.12,3683.22 646.52,3702.63 1397.51,3702.63 1543.18,3556.96 1543.18,3426.05 1848.17,3121.06 2092.52,3121.06 2427.53,2786.05 2427.53,2686.64 2679.13,2435.04 v1(2846.46,2435.04)
JTDO: R42.2 U1.133 U9.13 | length 2310.4
  Top Layer w10: U9.13@1075.58,3540.93 1155.58,3460.94 R42.2@1155.58,3298.34 ; v1(2280.51,2872.05) 2280.51,2690.69 2330.54,2640.66 U1.133@2330.54,2342.19
  Bottom Layer w10: U9.13@1075.58,3540.93 1075.58,3537.35 1186.77,3426.16 1477.12,3426.16 1818.64,3084.65 2067.91,3084.65 v1(2280.51,2872.05)
JTMS: R41.2 U1.105 U9.7 | length 3176.7
  Top Layer w10: U9.7@775.58,3540.93 870.48,3446.03 R41.2@870.48,3298.34 ; U1.105@2901.41,2181.88 2879.06,2181.88 2878.17,2180.99 2878.96,2180.19 2970.4,2180.19 v1(2972.44,2178.15)
  Bottom Layer w10: U9.7@775.58,3540.93 1012.51,3304.01 1439.83,3304.01 1730.06,3013.78 2036.42,3013.78 2353.55,2696.65 2353.55,2677.94 2640.75,2390.75 2765.75,2390.75 2972.44,2184.06 v1(2972.44,2178.15)
JTRST: R38.2 U1.134 U9.3 | length 2686.9
  Top Layer w10: U9.3@575.58,3540.93 575.58,3308.14 R38.2@585.38,3298.34 ; v1(2269.68,2637.8) 2275.59,2637.8 2310.86,2602.53 U1.134@2310.86,2342.19
  Bottom Layer w10: U9.3@575.58,3540.93 873.53,3242.98 1428.02,3242.98 1695.61,2975.39 2027.56,2975.39 2263.78,2739.17 2263.78,2643.7 v1(2269.68,2637.8)
KEY_LINE0: P2.1 U1.26 | length 1815.5
  Top Layer w10: P2.1@352.94,2115.42 367.85,2115.42 417.45,2065.82 867.39,2065.82 1102.63,1830.58 1513.57,1830.58 1514.76,1831.77 1567.84,1831.77 1650.8,1748.81 U1.26@2015.58,1748.81
KEY_LINE1: P2.3 U1.27 | length 1781.2
  Top Layer w10: P2.3@352.94,2015.42 365.23,2015.42 416.21,1964.44 885.96,1964.44 1121.27,1729.12 U1.27@2015.58,1729.12
KEY_LINE2: P2.5 U1.28 | length 1773.1
  Top Layer w10: P2.5@352.94,1915.42 403.34,1865.03 889.89,1865.03 1075.79,1679.13 1713.58,1679.13 1743.89,1709.44 U1.28@2015.58,1709.44
KEY_LINE3: P2.7 U1.29 | length 1758.7
  Top Layer w10: P2.7@352.94,1815.42 404.4,1763.97 904.34,1763.97 1031.64,1636.66 1725.54,1636.66 1778.63,1689.75 U1.29@2015.58,1689.75
KEY_ROW0: P2.2 U1.44 | length 3438
  Top Layer w10: P2.2@452.94,2115.42 390.34,2178.02 328.61,2178.02 257.75,2107.15 257.75,1640.62 330.42,1567.94 1248.99,1567.94 1438.98,1377.95 v1(1920.28,1377.95) ; v1(1921.26,1024.61) 1948.82,1062.99 2001.97,1062.99 2251.8,1312.82 U1.44@2251.8,1456.37
  Bottom Layer w10: v1@1920.28,1025.59 v1(1920.28,1377.95)
KEY_ROW1: P2.4 U1.45 | length 3257.5
  Top Layer w10: P2.4@452.94,2015.42 427.49,2015.42 376.97,2065.94 329.72,2065.94 293.18,2029.4 293.18,1708.04 338.31,1662.9 930.6,1662.9 989.83,1603.67 1295.02,1603.67 1481.37,1417.32 1942.91,1417.32 1975.39,1384.84 v1(1975.39,1373.03) ; v1(1976.38,1020.67) 1992.13,1036.42 2016.73,1036.42 2271.49,1291.17 U1.45@2271.49,1453.53
  Bottom Layer w10: v1(1975.39,1373.03) 1976.38,1372.05 v1@1977.36,1030.51
KEY_ROW2: P2.6 U1.96 | length 3937
  Top Layer w10: v1@2701.77,2013.78 2710.63,2013.78 2719.7,2004.71 U1.96@2901.41,2004.71
  Bottom Layer w10: P2.6@452.94,1915.42 516.8,1915.42 819.88,2218.5 819.88,2855.32 871.06,2906.5 1990.16,2906.5 2114.17,2782.48 2114.17,2504.92 2137.79,2481.31 2422.24,2481.31 2576.44,2327.1 2667,2327.1 2708.66,2285.43 2708.66,2020.67 v1@2701.77,2013.78
  other v1: 2706.69,2006.89
KEY_ROW3: P2.8 U1.97 | length 4224.7
  Top Layer w10: v1(2742.13,2043.31) 2761.03,2024.4 U1.97@2901.41,2024.4
  Bottom Layer w10: P2.8@452.94,1815.42 452.94,1827.53 404.51,1875.97 404.51,2149.59 428.64,2173.72 661.91,2173.72 745.08,2256.89 745.08,2865.16 816.93,2937.01 2020.67,2937.01 2149.61,2808.07 2149.61,2534.45 2169.29,2514.76 2427.17,2514.76 2594.61,2347.31 2698.95,2347.31 2736.22,2310.04 2736.22,2049.21 v1(2742.13,2043.31)
LCD_CS: P2.10 R4.1 U1.137 | length 2669.1
  Top Layer w10: v1(1813.98,2451.77) 1813.98,2486.22 1920.15,2592.39 2204.85,2592.39 2251.8,2545.44 U1.137@2251.8,2342.19
  Bottom Layer w10: P2.10@452.94,1715.42 454.06,1716.54 619.13,1716.54 R4.1@662.6,1760 662.6,1823.03 744.95,1905.38 1655.38,1905.38 1813.98,2063.98 v1(1813.98,2451.77)
LCD_SCK: P2.12 R6.1 U1.140 | length 2622.9
  Top Layer w10: P2.12@452.94,1615.42 458.13,1610.24 v1(846.46,1610.24) ; v1@1855.32,2451.77 v1(1856.3,2452.76) 2147.64,2452.76 2192.75,2407.65 U1.140@2192.75,2342.19
  Bottom Layer w10: P2.12@452.94,1615.42 638.02,1615.42 R6.1@662.6,1640 ; v1(846.46,1610.24) 860.24,1610.24 1128.81,1878.81 1669.16,1878.81 1856.3,2065.94 v1(1856.3,2452.76)
LCD_SDI: P2.14 R8.1 U1.139 | length 2893.8
  Top Layer w10: v1(1889.76,2500) 2171.26,2500 2212.43,2458.83 U1.139@2212.43,2342.19
  Bottom Layer w10: R8.1@662.6,1520 658.02,1515.42 P2.14@452.94,1515.42 598.29,1370.08 770.67,1370.08 1242,1841.41 1674.08,1841.41 1890.75,2058.07 v1@1890.75,2500.98
LED0: R9.2 U1.73 | length 694.5
  Top Layer w10: U1.73@2901.41,1551.96 2954.67,1551.96 3045.7,1460.93 R9.2@3558.18,1460.93
LED1: R10.2 U1.74 | length 698.8
  Top Layer w10: U1.74@2901.41,1571.64 2974.62,1571.64 3020.67,1525.59 3502.84,1525.59 R10.2@3558.18,1580.93
LED2: R11.2 U1.75 | length 732.2
  Top Layer w10: U1.75@2901.41,1591.33 2987.41,1591.33 3023.62,1555.12 3412.36,1555.12 R11.2@3558.18,1700.93
LED3: R12.2 U1.76 | length 768
  Top Layer w10: U1.76@2901.41,1611.01 3013.99,1611.01 3043.31,1581.69 3318.94,1581.69 R12.2@3558.18,1820.93
NetBAT1_1: BAT1.1 D7.1 | length 509.1
  Bottom Layer w50: BAT1.1@915.58,2820.93 926.47,2810.04 1059.06,2810.04 1284.31,2584.78 1320.1,2584.78 D7.1@1324.88,2580
NetC1_2: C1.2 U3.28 Y1.2 | length 532.5
  Bottom Layer w10: Y1.2@4293.46,1698.82 Y1.2@4315.58,1720.93
  Bottom Layer w13: U3.28@3837.67,1810.58 3917.51,1810.58
  Bottom Layer w15: 3917.51,1810.58 3975.14,1752.95
  Bottom Layer w20: 3975.14,1752.95 C1.2@4041.34,1752.95 ; C1.2@4044.29,1732.28 4090.55,1686.02 4280.67,1686.02 Y1.2@4293.46,1698.82
NetC2_2: C2.2 U3.27 Y1.1 | length 523.5
  Bottom Layer w10: 3982.82,1836.17 3983.55,1836.9 ; Y1.1@4304.56,1931.96 Y1.1@4315.58,1920.93
  Bottom Layer w13: U3.27@3837.67,1836.17 3982.82,1836.17
  Bottom Layer w20: 3982.82,1837.63 4075.66,1930.46 4075.66,1931.96 Y1.1@4304.56,1931.96